# Altium PCB PCB1.PcbDoc
Units mil, origin at the board's own origin, x right, y up, seen from the top; angles counter-clockwise.
Board outline 6000 x 4000 mil, 2 copper layers (Top Layer, Bottom Layer); 10 components, 10 nets, 20 pads, 0 vias.
Unrouted connection lines stored in the file: 10.
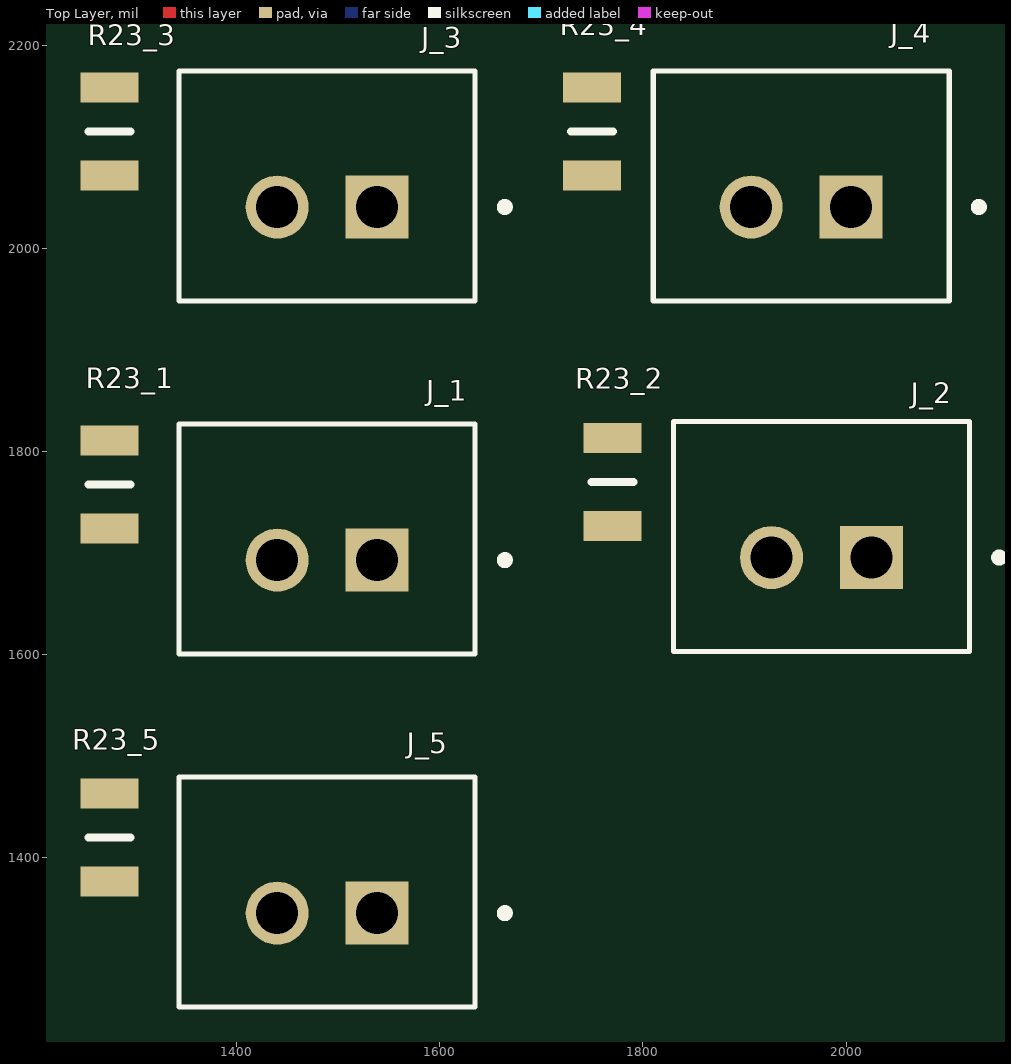
[diagram p0: Top Layer view]
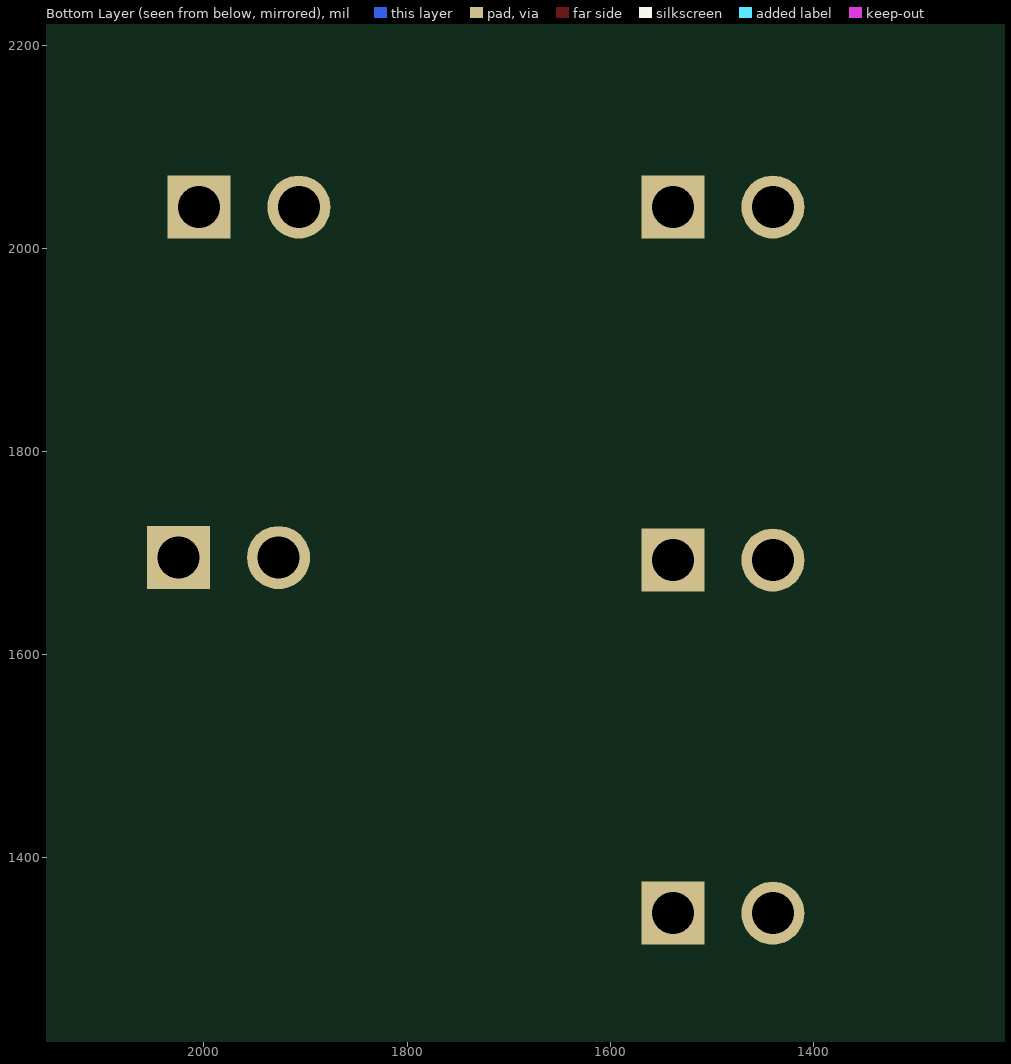
[diagram p1: Bottom Layer view, seen from below]

## Layer stack, top to bottom
Top Solder: solder mask 0.4, Solder Resist, Dk 3.5
Top Layer: signal copper 1.4
Dielectric 1: dielectric 12.6, FR-4, Dk 4.8
Bottom Layer: signal copper 1.4
Bottom Solder: solder mask 0.4, Solder Resist, Dk 3.5

## Board outline
1000,1000 7000,1000 7000,5000 1000,5000

## Design rules (kind name [scope] priority, off if disabled: settings)
Clearance [All] p1: gap=10 ignorepadtopadclearanceinfootprint=FALSE except(0: Arc-Hole Track-Hole SMDPad-Hole THPad-Hole Via-Hole Fill-Hole Poly-Hole Region-Hole Text-Hole)
PolygonConnect [All] p1: connectstyle=Relief reliefconductorwidth=10 reliefentries=4 polygonreliefangle="90 Angle" airgapwidth=10
RoutingVias [All] p1: holewidth=28 width=50 viastyle="Through Hole" minholewidth=28 minwidth=50 maxholewidth=28 maxwidth=50
SolderMaskExpansion [All] p1: expansion=4 istentingtop=FALSE
Width [All] p1: maxlimit=10 minlimit=10 preferedwidth=10
30 further rules are at their usual default settings.

## Components (designator, comment, footprint, x,y, rotation, side; value= is the part's Value field where it differs from the comment)
J_1 "B2B-XH-A(LF)(SN)" JST_B2B-XH-A(LF)(SN) 1489.21,1713.88 r0 top
J_2 "B2B-XH-A(LF)(SN)" JST_B2B-XH-A(LF)(SN) 1975.79,1716.38 r0 top
J_3 "B2B-XH-A(LF)(SN)" JST_B2B-XH-A(LF)(SN) 1489.21,2061.38 r0 top
J_4 "B2B-XH-A(LF)(SN)" JST_B2B-XH-A(LF)(SN) 1955.79,2061.38 r0 top
J_5 "B2B-XH-A(LF)(SN)" JST_B2B-XH-A(LF)(SN) 1489.21,1366.38 r0 top
R23_1 "NTCS0805E3104GMT" THRMC2012X95N 1275,1767.5 r90 top
R23_2 "NTCS0805E3104GMT" THRMC2012X95N 1770,1770 r90 top
R23_3 "NTCS0805E3104GMT" THRMC2012X95N 1275,2115 r90 top
R23_4 "NTCS0805E3104GMT" THRMC2012X95N 1750,2115 r90 top
R23_5 "NTCS0805E3104GMT" THRMC2012X95N 1275,1420 r90 top

## Footprints (in the part's own frame and the unit in brackets; to place one, negate y for a bottom-side part, rotate by r counter-clockwise, add the part's x,y. Pads: shape width x height; smd on the part's side, far side on the other; paste and mask are expansions set on the pad)
JST_B2B-XH-A(LF)(SN) [mm]
  rect 1.575x1.575 / inner round 1.575 / far side rect 1.575x1.575 hole 1.05: 1(1.25,-0.525)
  round 1.575 hole 1.05: 2(-1.25,-0.525)
  silkscreen extent -3.7,-2.88 4.54,2.88, body extent -3.7,-2.88 3.7,2.88, height 7
THRMC2012X95N [mm]
  rect 0.75x1.45 smd: 1(-1.1,0) 2(1.1,0)
  silkscreen extent 0,-0.53 0,0.53, body extent -1,-0.63 1,0.63, height 0.95

## Part data
J_1 J_2 J_3 J_4 J_5: "Connector Header Through Hole 2 position 0.098 (2.50mm)", Package=None, Check_prices=https://www.snapeda.com/parts/B2B-XH-A(LF)(SN)/JST+Sales+America+Inc./view-part/?ref=eda, MF="JST Sales America Inc.", MP=B2B-XH-A(LF)(SN), SnapEDA_Link=https://www.snapeda.com/parts/B2B-XH-A(LF)(SN)/JST+Sales+America+Inc./view-part/?ref=snap
R23_1 R23_2 R23_3 R23_4 R23_5: "Thermistor", Manufacturer_Name=Vishay, Mouser Part Number=594-NTCS0805E3104GMT, Datasheet Link=http://www.vishay.com/docs/29044/ntcs0805e3t.pdf, Height=0.95mm, Manufacturer_Part_Number=NTCS0805E3104GMT, Mouser Price/Stock=https://www.mouser.co.uk/ProductDetail/Vishay-BC-Components/NTCS0805E3104GMT?qs=%2FWiulJ9oly70BwjDbuc51g%3D%3D

## Nets (pads, with @x,y where several pads share a name; then routed paths per layer and width w, separated by ;. In a path a pad name is that pad's centre, name@x,y a point inside that pad or via, vN(x,y) a via of type N, cw(c..) or ccw(c..) an arc to the next point about the centre after c; other vN are vias at no path point)
NetJ_1_1: J_1.1 R23_1.1
NetJ_1_2: J_1.2 R23_1.2
NetJ_2_1: J_2.1 R23_2.1
NetJ_2_2: J_2.2 R23_2.2
NetJ_3_1: J_3.1 R23_3.1
NetJ_3_2: J_3.2 R23_3.2
NetJ_4_1: J_4.1 R23_4.1
NetJ_4_2: J_4.2 R23_4.2
NetJ_5_1: J_5.1 R23_5.1
NetJ_5_2: J_5.2 R23_5.2